# Altium PCB DB25-relay-HV-control.PcbDoc
Units mil, origin at the board's own origin, x right, y up, seen from the top; angles counter-clockwise.
Board outline 3100 x 2800 mil, 2 copper layers (Top Layer, Bottom Layer); 46 components, 42 nets, 170 pads, 0 vias.
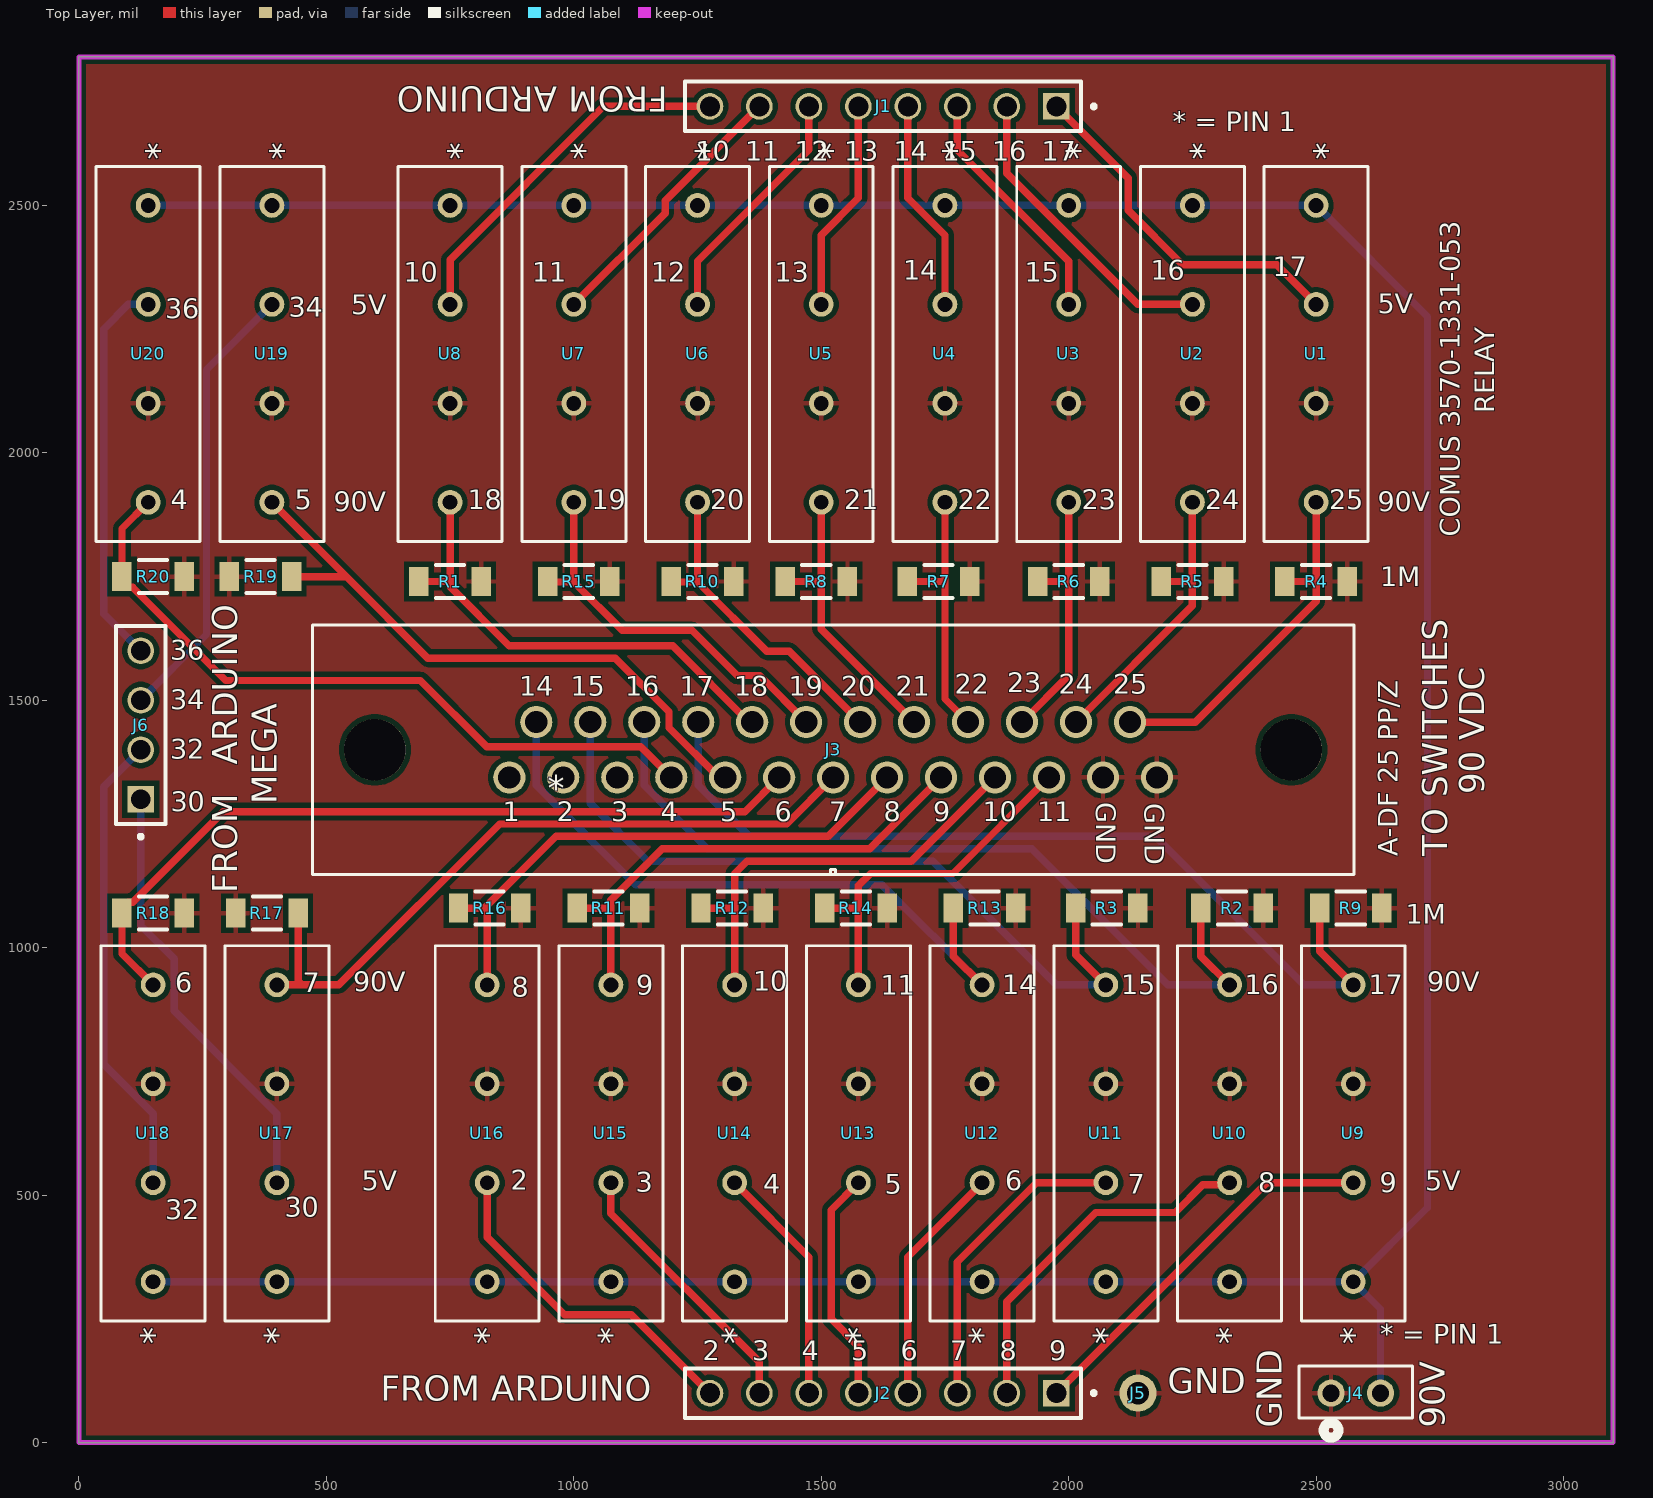
[diagram p0: Top Layer view]
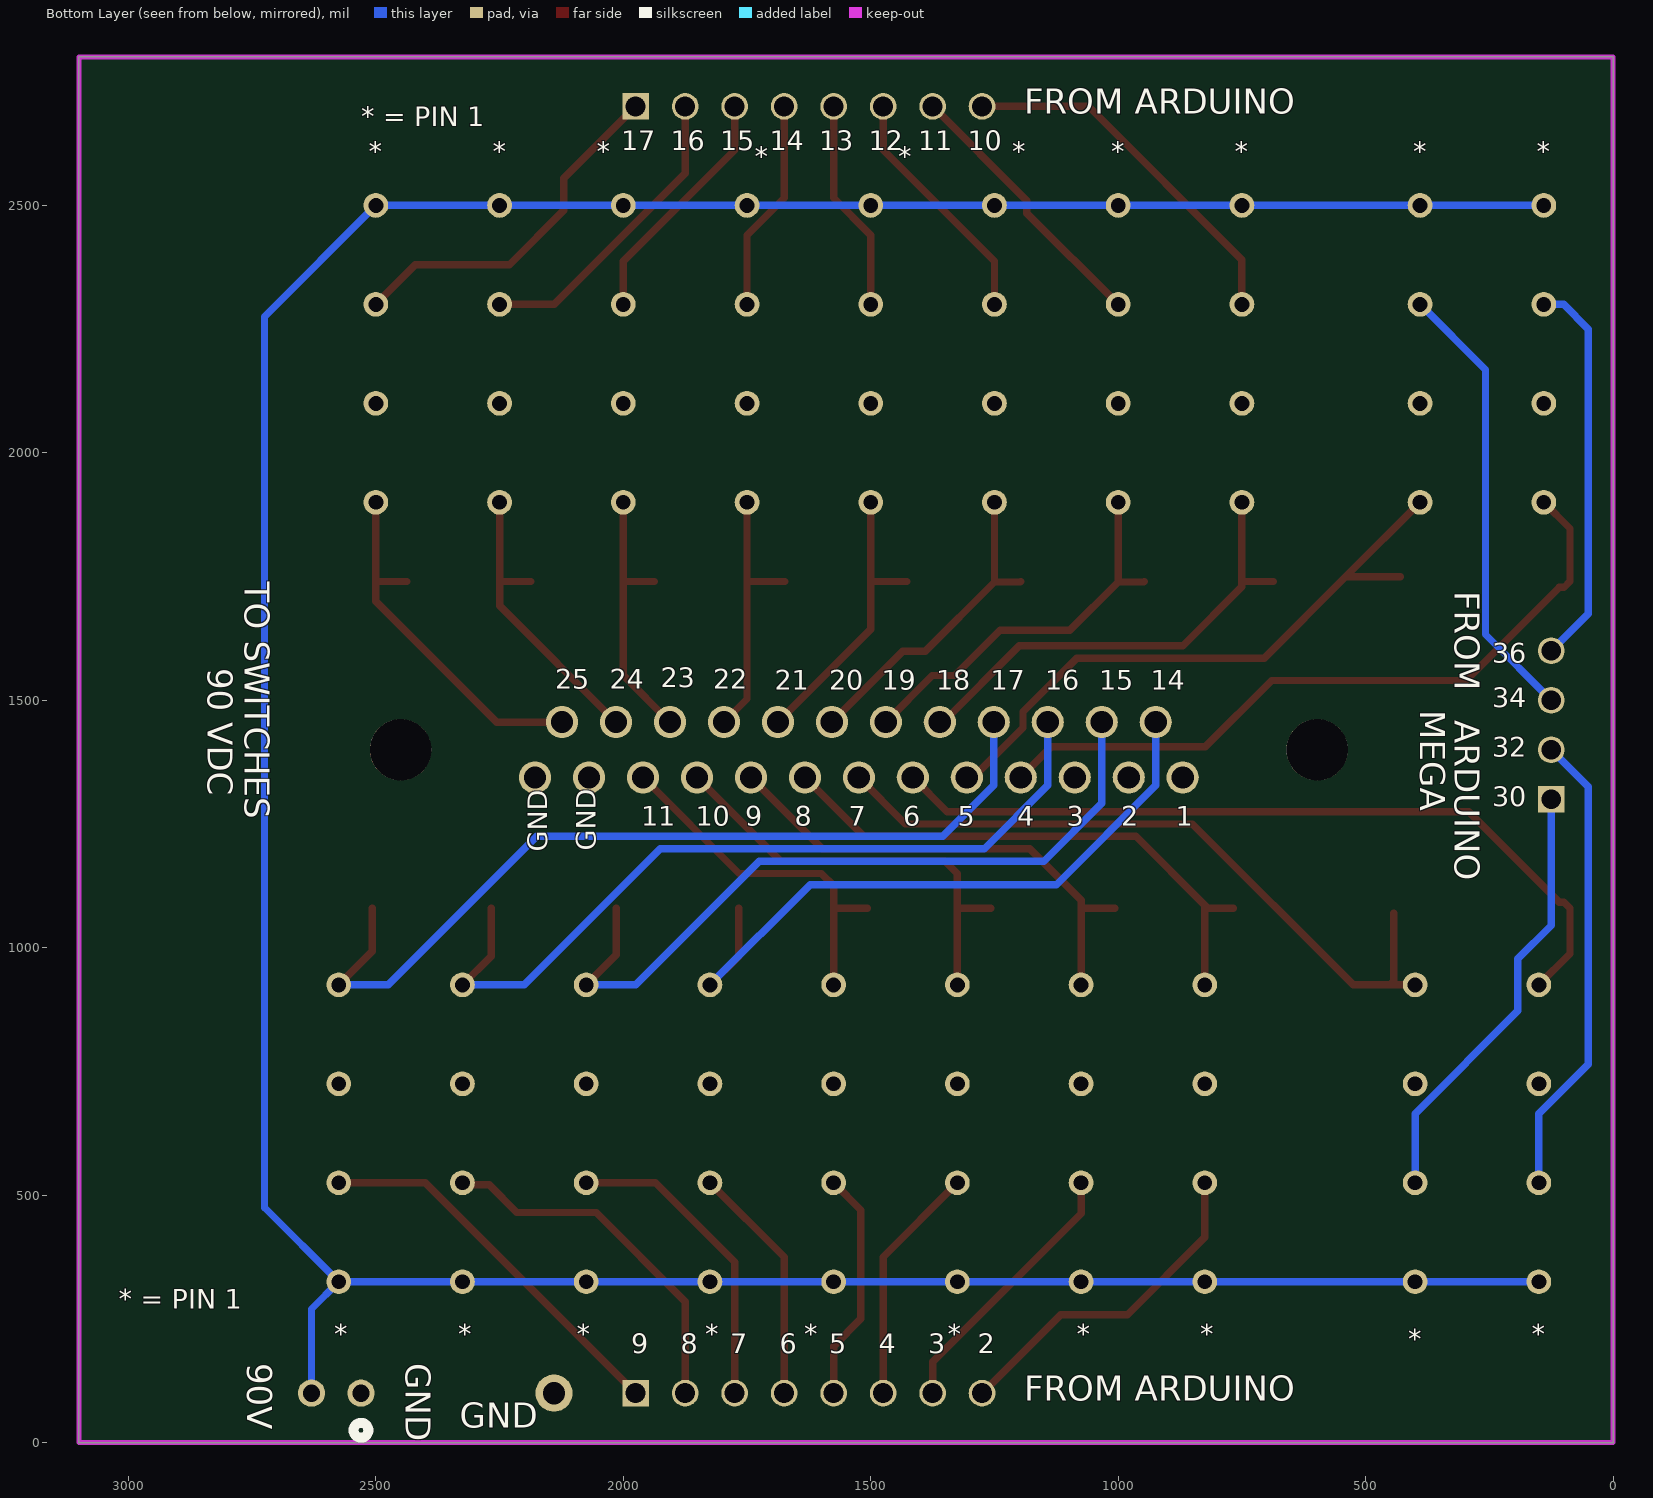
[diagram p1: Bottom Layer view, seen from below]
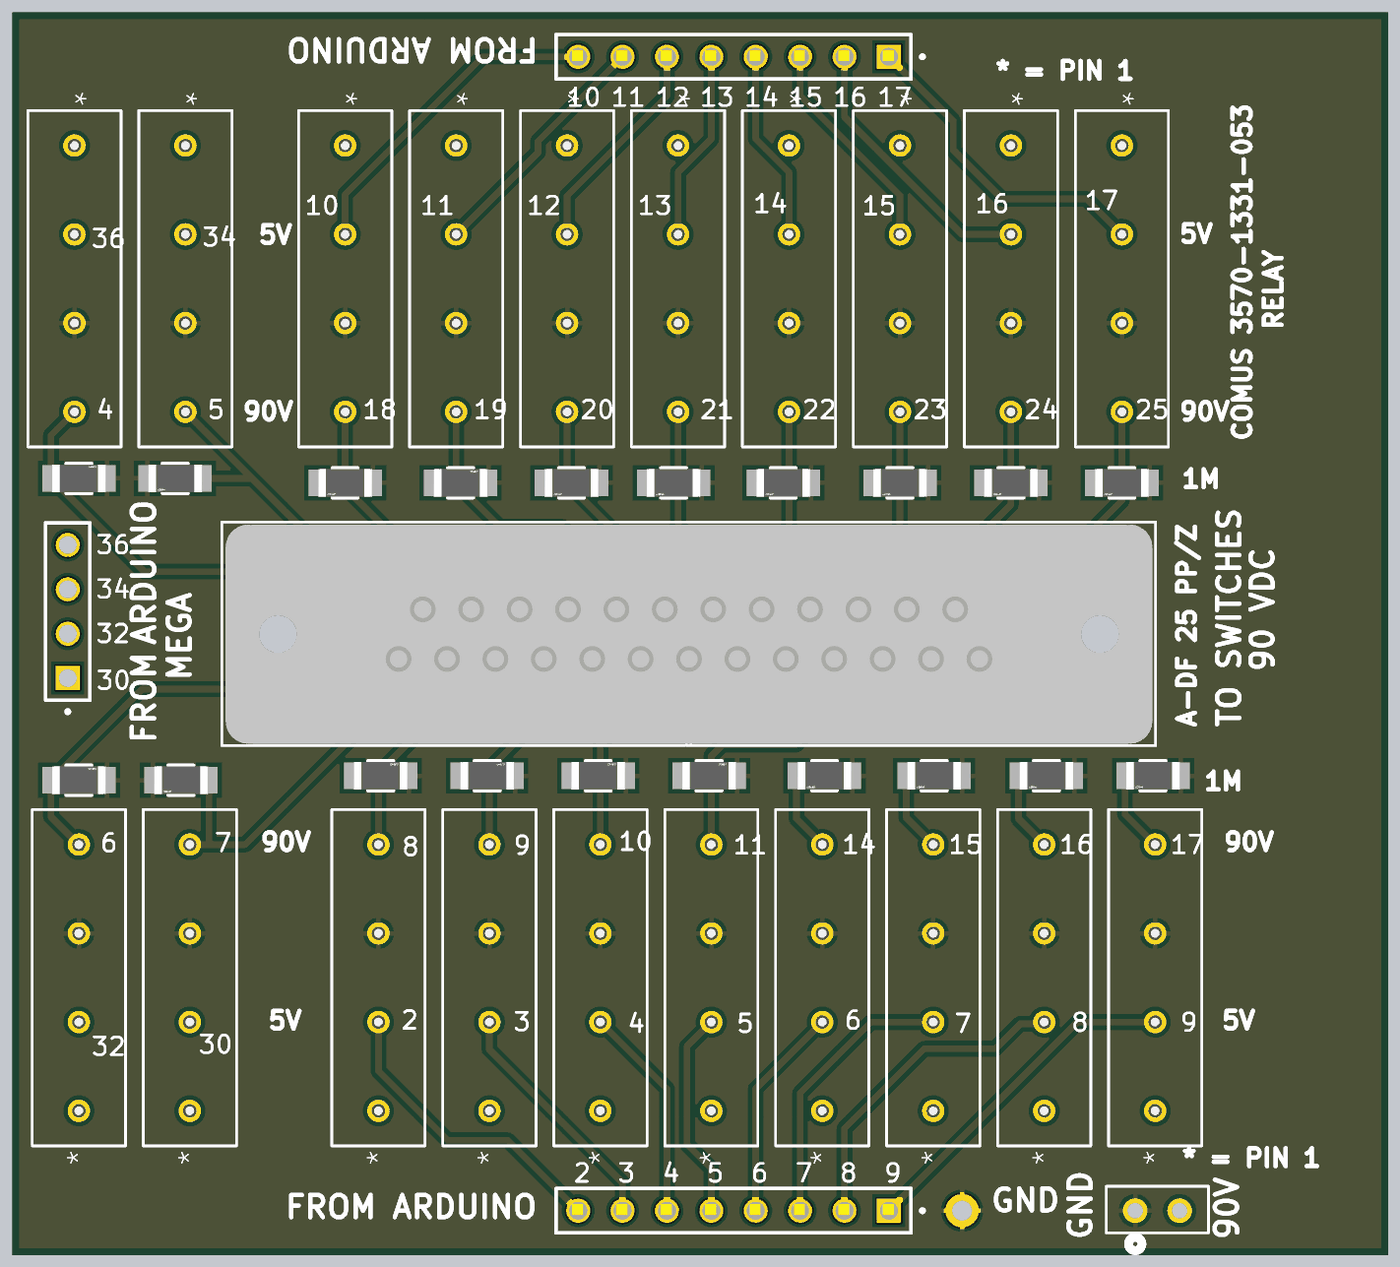
[diagram p2: 3D render of the assembled board from above, using the file's embedded part models]

## Layer stack, top to bottom
Top Solder: solder mask 0.4, Solder Resist, Dk 3.5
Top Layer: signal copper 1.4
Dielectric 1: dielectric 12.6, FR-4, Dk 4.8
Bottom Layer: signal copper 1.4
Bottom Solder: solder mask 0.4, Solder Resist, Dk 3.5

## Board outline
0,0 0,2800 3100,2800 3100,0

## Design rules (kind name [scope] priority, off if disabled: settings)
Clearance [All] p1: gap=10 ignorepadtopadclearanceinfootprint=FALSE
PolygonConnect [All] p1: connectstyle=Relief reliefconductorwidth=10 reliefentries=4 polygonreliefangle="90 Angle" airgapwidth=10
RoutingVias [All] p1: holewidth=28 width=50 viastyle="Through Hole" minholewidth=28 minwidth=50 maxholewidth=28 maxwidth=50
SolderMaskExpansion [All] p1: expansion=4 istentingtop=FALSE
Width [All] p1: maxlimit=30 minlimit=10 preferedwidth=15 minimp=50.000000 maximp=50.000000 favimp=50.000000
30 further rules are at their usual default settings.

## Components (designator, comment, footprint, x,y, rotation, side; value= is the part's Value field where it differs from the comment)
J1 "TSW-108-07-G-S" SAMTEC_TSW-108-07-G-S 1625,2700 r180 top
J2 "TSW-108-07-G-S" SAMTEC_TSW-108-07-G-S 1625,100 r180 top
J3 "A-DF 25 PP/Z" "CONN_A-DF 25 PPZ_ASM" 869.68,1344.09 r180 top
J4 "TSW-102-07-G-S" CON2_1X2_TU_TSW 2580,100 r0 top
J5 "Single Pin" "Single PC Pin" 2140,100 r0 top
J6 "TSW-104-07-G-S" SAMTEC_TSW-104-07-G-S 125,1450 r90 top
R1 "RC1206JR-070RL" FP-RC1206-MFG 750,1740 r180 top value=0Ω
R2 "RC1206JR-070RL" FP-RC1206-MFG 2330,1080 r180 top value=0Ω
R3 "RC1206JR-070RL" FP-RC1206-MFG 2077.01,1080 r180 top value=0Ω
R4 "RC1206JR-070RL" FP-RC1206-MFG 2500,1740 r180 top value=0Ω
R5 "RC1206JR-070RL" FP-RC1206-MFG 2250,1740 r180 top value=0Ω
R6 "RC1206JR-070RL" FP-RC1206-MFG 2000,1740 r180 top value=0Ω
R7 "RC1206JR-070RL" FP-RC1206-MFG 1737.01,1740 r180 top value=0Ω
R8 "RC1206JR-070RL" FP-RC1206-MFG 1490,1740 r180 top value=0Ω
R9 "RC1206JR-070RL" FP-RC1206-MFG 2570,1080 r180 top value=0Ω
R10 "RC1206JR-070RL" FP-RC1206-MFG 1260,1740 r180 top value=0Ω
R11 "RC1206JR-070RL" FP-RC1206-MFG 1070,1080 r0 top value=0Ω
R12 "RC1206JR-070RL" FP-RC1206-MFG 1320,1080 r0 top value=0Ω
R13 "RC1206JR-070RL" FP-RC1206-MFG 1830,1080 r180 top value=0Ω
R14 "RC1206JR-070RL" FP-RC1206-MFG 1570,1080 r0 top value=0Ω
R15 "RC1206JR-070RL" FP-RC1206-MFG 1010,1740 r0 top value=0Ω
R16 "RC1206JR-070RL" FP-RC1206-MFG 830,1080 r0 top value=0Ω
R17 "RC1206JR-070RL" FP-RC1206-MFG 380,1070 r180 top value=0Ω
R18 "RC1206JR-070RL" FP-RC1206-MFG 150,1070 r0 top value=0Ω
R19 "RC1206JR-070RL" FP-RC1206-MFG 367.01,1750 r180 top value=0Ω
R20 "RC1206JR-070RL" FP-RC1206-MFG 150,1750 r0 top value=0Ω
U1 "3570-1331-051" SIP_3570-1331_COM 2500,2500 r270 top
U2 "3570-1331-051" SIP_3570-1331_COM 2250,2500 r270 top
U3 "3570-1331-051" SIP_3570-1331_COM 2000,2500 r270 top
U4 "3570-1331-051" SIP_3570-1331_COM 1750,2500 r270 top
U5 "3570-1331-051" SIP_3570-1331_COM 1500,2500 r270 top
U6 "3570-1331-051" SIP_3570-1331_COM 1250,2500 r270 top
U7 "3570-1331-051" SIP_3570-1331_COM 1000,2500 r270 top
U8 "3570-1331-051" SIP_3570-1331_COM 750,2500 r270 top
U9 "3570-1331-051" SIP_3570-1331_COM 2575,325 r90 top
U10 "3570-1331-051" SIP_3570-1331_COM 2325,325 r90 top
U11 "3570-1331-051" SIP_3570-1331_COM 2075,325 r90 top
U12 "3570-1331-051" SIP_3570-1331_COM 1825,325 r90 top
U13 "3570-1331-051" SIP_3570-1331_COM 1575,325 r90 top
U14 "3570-1331-051" SIP_3570-1331_COM 1325,325 r90 top
U15 "3570-1331-051" SIP_3570-1331_COM 1075,325 r90 top
U16 "3570-1331-051" SIP_3570-1331_COM 825,325 r90 top
U17 "3570-1331-051" SIP_3570-1331_COM 400,325 r90 top
U18 "3570-1331-051" SIP_3570-1331_COM 150,325 r90 top
U19 "3570-1331-051" SIP_3570-1331_COM 390,2500 r270 top
U20 "3570-1331-051" SIP_3570-1331_COM 140,2500 r270 top

## Footprints (in the part's own frame and the unit in brackets; to place one, negate y for a bottom-side part, rotate by r counter-clockwise, add the part's x,y. Pads: shape width x height; smd on the part's side, far side on the other; paste and mask are expansions set on the pad)
CON2_1X2_TU_TSW [mil]
  round 55 / inner round 60 / far side round 55 hole 35 paste-99999 mask+0: 1(-50,0) 2(50,0)
  silkscreen extent -115,-90 115,55
"CONN_A-DF 25 PPZ_ASM" [mil]
  round 65 / inner round 60 / far side round 65 hole 45 paste-99999 mask+0: 1(0,0) 2(-109.06,0) 3(-218.11,0) 4(-327.17,0) 5(-436.22,0) 6(-545.28,0) 7(-654.33,0) 8(-763.39,0) 9(-872.44,0) 10(-981.5,0) 11(-1090.55,0) 12(-1199.61,0) 13(-1308.66,0) 14(-54.53,-111.81) 15(-163.58,-111.81) 16(-272.64,-111.81) 17(-381.69,-111.81) 18(-490.75,-111.81) 19(-599.8,-111.81) 20(-708.86,-111.81) 21(-817.91,-111.81) 22(-926.97,-111.81) 23(-1036.02,-111.81) 24(-1145.08,-111.81) 25(-1254.13,-111.81)
  round 124 / inner round 60 / far side round 124 hole 124 unplated paste-99999 mask-62: 26(-1580.32,-55.91) 27(271.65,-55.91)
  silkscreen extent -1706,-308 398,196, body extent -1699,-302 389,192, height 478
FP-RC1206-MFG [mm]
  rect 1x1.5 smd paste+0 mask+0: 1(-1.6,0) 2(1.6,0)
  silkscreen extent -0.72,-0.85 0.72,0.85, body extent -2.2,-0.95 2.2,0.95, height 0.25
SAMTEC_TSW-104-07-G-S [mm]
  rect 1.37x1.37 / inner round 1.37 / far side rect 1.37x1.37 hole 1.02: 01(-3.81,0)
  round 1.37 hole 1.02: 02(-1.27,0) 03(1.27,0) 04(3.81,0)
  silkscreen extent -5.83,-1.27 5.08,1.27
SAMTEC_TSW-108-07-G-S [mm]
  rect 1.37x1.37 / inner round 1.37 / far side rect 1.37x1.37 hole 1.02: 01(-8.89,0)
  round 1.37 hole 1.02: 02(-6.35,0) 03(-3.81,0) 04(-1.27,0) 05(1.27,0) 06(3.81,0) 07(6.35,0) 08(8.89,0)
  silkscreen extent -10.91,-1.27 10.16,1.27, body extent -10.25,-1.34 10.2,1.2, height 1.34
"Single PC Pin" [mil]
  round 75 hole 45: 1(0,0)
SIP_3570-1331_COM [mil]
  round 50 / inner round 60 / far side round 50 hole 30 paste-99999 mask+0: 1(0,0) 2(200,0) 3(400,0) 4(600,0)
  silkscreen extent -79,-105 679,105, body extent -74,-100 674,100, height 130

## Part data
J1 J2: "TSW - Samtec 2.54mm Pin Header 10.92mm Overall Pin Length (07) - Fast Stock", Package=None, Check_prices=https://www.snapeda.com/parts/TSW-108-07-G-S/Samtec+Inc./view-part/?ref=eda, MF="Samtec Inc.", MP=TSW-108-07-G-S, SnapEDA_Link=https://www.snapeda.com/parts/TSW-108-07-G-S/Samtec+Inc./view-part/?ref=snap
J3: library part "A-DF 25 PPZ", "No Description Available", Mfr_Name=Assmann, Copyright="Copyright (C) 2024 Ultra Librarian. All rights reserved.", Manufacturer_Part_Number="A-DF 25 PP/Z", RefDes=RefDes, Type=DEV
J4: "No Description Available", Mfr_Name="Samtec Inc", Copyright="Copyright (C) 2024 Ultra Librarian. All rights reserved.", Manufacturer_Part_Number=TSW-102-07-G-S, RefDes=RefDes, Type=DEV
J5: library part "Single PC Pin", Supplier Part Number 1=575-2617001340000, Supplier 1=Mouser
J6: "<a href=\"https://pricing.snapeda.com/parts/TSW-104-07-G-S/Samtec/view-part?ref=eda\">Check availability</a>", Package=None, Availability=Unavailable, MP=altium_native_batch, Price=None
R1 R2 R3 R4 R5 R6 R7 R8 R9 R10 R11 R12 R13 R14 R15 R16 R17 R18 R19 R20: library part CMP-2100-03681-2, "RES SMD 0 OHM JUMPER 1/4W 1206", Manufacturer=YAGEO, Package=RC1206, Power Rating=0.25W, Resistance=0Ω, Temperature="-55°C to +155°C", Temperature Coefficient=300ppm/°C, Temperature Range High=+155°C, Temperature Range Low=-55°C, Tolerance=5%, Voltage Rating=200V, Automotive=No, Category=Res, ComponentLink2Description=Datasheet, ComponentLink2URL=https://www.yageo.com/upload/media/product/productsearch/datasheet/rchip/PYu-RC_Group_51_RoHS_L_10.pdf, Composition="Thick Film", Device Class L1="Passive Components", Device Class L2=Resistors, Device Class L3="Chip SMD Resistors", Digikey Description="RES SMD 0 OHM JUMPER 1/4W 1206", Footprint Url=https://www.yageo.com/upload/website/yageo_PYu-R_Mount_10_19050818_343.pdf, Height=0.65mm, Ipc Land Pattern Name=RESC310160X55, Lead Free=Yes, Manufacturer Part Number=RC1206JR-070RL, Mouser Description="Resistor: thick film; SMD; 1206; 0O; 0.25W; ±5%; -55÷155°C", Octopart=https://octopart.com/rc1206jr-070rl-yageo-40025601, RoHS=TRUE, Series=RC
U1 U2 U3 U4 U5 U6 U7 U8 U9 U10 U11 U12 U13 U14 U15 U16 U17 U18 U19 U20: "No Description Available", Mfr_Name=Comus, Copyright="Copyright (C) 2024 Ultra Librarian. All rights reserved.", Manufacturer_Part_Number=3570-1331-051, RefDes=RefDes, Type=DEV

## Nets (pads, with @x,y where several pads share a name; then routed paths per layer and width w, separated by ;. In a path a pad name is that pad's centre, name@x,y a point inside that pad or via, vN(x,y) a via of type N, cw(c..) or ccw(c..) an arc to the next point about the centre after c; other vN are vias at no path point)
GND: J3.12 J3.13 J4.1 J5.1 R1.1 R2.1 R3.1 R4.1 R5.1 R6.1 R7.1 R8.1 R9.1 R10.1 R11.2 R12.2 R13.1 R14.2 R15.2 R16.2 R17.2 R18.2 R19.2 R20.2 U1.3 U2.3 U3.3 U4.3 U5.3 U6.3 U7.3 U8.3 U9.3 U10.3 U11.3 U12.3 U13.3 U14.3 U15.3 U16.3 U17.3 U18.3 U19.3 U20.3
NetJ1_01: J1.01 U1.2 | length 728.8
  Top Layer w15: J1.01 2120,2555 2120,2490 2230,2380 2420,2380 U1.2
NetJ1_02: J1.02 U2.2 | length 619.8
  Top Layer w15: J1.02 1875,2564.9 2139.9,2300 U2.2
NetJ1_03: J1.03 U3.2 | length 493.2
  Top Layer w15: J1.03 1775,2611.97 2000,2386.97 U3.2
NetJ1_04: J1.04 U4.2 | length 431.1
  Top Layer w15: J1.04 1675,2514.9 1750,2439.9 U4.2
NetJ1_05: J1.05 U5.2 | length 431.1
  Top Layer w15: U5.2 1500,2439.9 1575,2514.9 J1.05
NetJ1_06: J1.06 U6.2 | length 493.2
  Top Layer w15: U6.2 1250,2386.97 1475,2611.97 J1.06
NetJ1_07: J1.07 U7.2 | length 555.3
  Top Layer w15: U7.2 1184.49,2484.49 1184.49,2509.49 J1.07
NetJ1_08: J1.08 U8.2 | length 743.4
  Top Layer w15: U8.2 750,2390 1060,2700 J1.08
NetJ2_01: J2.01 U9.2 | length 776
  Top Layer w15: J2.01 2400,525 U9.2
NetJ2_02: J2.02 U10.2 | length 739.8
  Top Layer w15: J2.02 1875,285 2055,465 2215,465 2271.17,521.17 2321.17,521.17 U10.2 U10.2@2321.17,528.83
NetJ2_03: J2.03 U11.2 | length 631.3
  Top Layer w15: J2.03 1775,365 1935,525 U11.2
NetJ2_04: J2.04 U12.2 | length 487.1
  Top Layer w15: J2.04 1675,375 U12.2
NetJ2_05: J2.05 U13.2 | length 470.6
  Top Layer w15: J2.05 1575,195 1520,250 1520,470 U13.2
NetJ2_06: J2.06 U14.2 | length 487.1
  Top Layer w15: U14.2 1475,375 J2.06
NetJ2_07: J2.07 U15.2 | length 549.3
  Top Layer w15: U15.2 1075,463.03 1375,163.03 J2.07
NetJ2_08: J2.08 U16.2 | length 690.5
  Top Layer w15: U16.2 825,415 981.27,258.73 1116.27,258.73 J2.08
NetJ3_4: J3.4 R20.1 U20.4 | length 1455.7
  Top Layer w15: U20.4 87.01,1847.01 R20.1 87.01,1740.16 99.19,1727.97 109.04,1727.97 297.01,1540 689.9,1540 823.99,1405.91 1135.04,1405.91 J3.4
NetJ3_5: J3.5 R19.1 U19.4 | length 1275.1
  Top Layer w15: U19.4 540,1750 ; R19.1 540,1750 ; J3.5 1292.48,1344.09 1192.32,1444.25 1192.32,1476.62 1083.94,1585 705,1585 540,1750
NetJ3_6: J3.6 R18.1 U18.4 | length 1618.3
  Top Layer w15: U18.4 87.01,987.99 R18.1 87.01,1079.84 99.19,1092.03 109.04,1092.03 292.01,1275 1345.87,1275 J3.6
NetJ3_7: J3.7 R17.1 U17.4 | length 1445.5
  Top Layer w15: U17.4 450,925 ; R17.1 442.99,932.01 450,925 ; J3.7 1429.92,1250 850,1250 525,925 450,925
NetJ3_8: J3.8 R16.1 U16.4 | length 1136.4
  Top Layer w15: R16.1 819.03,1080 825,1085.97 ; U16.4 825,1085.97 ; J3.8 1513.98,1225 964.03,1225 825,1085.97
NetJ3_9: J3.9 R11.1 U15.4 | length 1010.9
  Top Layer w15: R11.1 1070,1080 1075,1075 ; U15.4 1075,1075 ; J3.9 1598.03,1200 1179.03,1200 1075,1095.97 1075,1075
NetJ3_10: J3.10 R12.1 U14.4 | length 901.6
  Top Layer w15: R12.1 1320,1080 1325,1075 ; U14.4 1325,1075 ; J3.10 1682.09,1175 1350,1175 1325,1150 1325,1075
NetJ3_11: J3.11 R14.1 U13.4 | length 744
  Top Layer w15: R14.1 1575,1080 ; U13.4 1575,1080 ; J3.11 1766.14,1150 1600,1150 1575,1125 1575,1080
NetJ3_14: J3.14 R13.2 U12.4 | length 1375.8
  Top Layer w15: R13.2 1767.01,982.99 U12.4
  Top Layer w30: J3.14 J3.14@925,1455.12
  Bottom Layer w15: J3.14 924.21,1327.91 1124.58,1127.54 1622.46,1127.54 U12.4
NetJ3_15: J3.15 R3.2 U11.4 | length 1538.1
  Top Layer w15: R3.2 2014.02,985.98 U11.4
  Bottom Layer w15: J3.15 1033.27,1291.73 1150,1175 1725,1175 1975,925 U11.4
NetJ3_16: J3.16 R2.2 U10.4 | length 1656.6
  Top Layer w15: R2.2 2267.01,982.99 U10.4
  Bottom Layer w15: J3.16 1142.32,1327.91 1270.23,1200 1925,1200 2200,925 U10.4
NetJ3_17: J3.17 R9.2 U9.4 | length 1801.7
  Top Layer w15: R9.2 2507.01,992.99 U9.4
  Bottom Layer w15: J3.17 1251.38,1327.91 1354.29,1225 2175,1225 2475,925 U9.4
NetJ3_18: J3.18 R1.2 U8.4 | length 957.5
  Top Layer w15: R1.2 750,1740 ; U8.4 750,1740 ; J3.18 1354.09,1455.91 1200,1610 869.03,1610 750,1729.03 750,1740
NetJ3_19: J3.19 R15.1 U7.4 | length 801.1
  Top Layer w15: R15.1 947.98,1739.03 1000,1739.03 ; U7.4 1000,1739.03 ; J3.19 1375.39,1550 1330,1550 1238.83,1641.17 1097.86,1641.17 1000,1739.03
NetJ3_20: J3.20 R10.2 U6.4 | length 660.2
  Top Layer w15: R10.2 1197.98,1739.03 1250,1739.03 ; U6.4 1250,1739.03 ; J3.20 1435.55,1598.9 1390.13,1598.9 1250,1739.03
NetJ3_21: J3.21 R8.2 U5.4 | length 594.8
  Top Layer w15: R8.2 1500,1740 ; U5.4 1500,1740 ; J3.21 1500,1643.5 1500,1740
NetJ3_22: J3.22 R7.2 U4.4 | length 539.4
  Top Layer w15: R7.2 1750,1740 ; U4.4 1750,1740 ; J3.22 1750,1502.56 1750,1740
NetJ3_23: J3.23 R6.2 U3.4 | length 546.1
  Top Layer w15: J3.23 2000,1550.2 2000,1740 ; R6.2 2000,1740 ; U3.4 2000,1740
NetJ3_24: J3.24 R5.2 U2.4 | length 604.5
  Top Layer w15: J3.24 2250,1691.14 2250,1740 ; R5.2 2250,1740 ; U2.4 2250,1740
NetJ3_25: J3.25 R4.2 U1.4 | length 740.3
  Top Layer w15: J3.25 2255.91,1455.91 2500,1700 2500,1740 ; R4.2 2500,1740 ; U1.4 2500,1740
NetJ4_2: J4.2 U1.1 U2.1 U3.1 U4.1 U5.1 U6.1 U7.1 U8.1 U9.1 U10.1 U11.1 U12.1 U13.1 U14.1 U15.1 U16.1 U17.1 U18.1 U19.1 U20.1 | length 7363.1
  Bottom Layer w15: U20.1 U19.1 U8.1 U7.1 U6.1 U5.1 U4.1 U3.1 U2.1 U1.1 2725,2275 2725,475 U9.1 ; U18.1 U17.1 U16.1 U15.1 U14.1 U13.1 U12.1 U11.1 U10.1 U9.1 ; J4.2 2630,270 U9.1
NetJ6_01: J6.01 U17.2 | length 888.9
  Bottom Layer w15: J6.01 125,1045 192.5,977.5 192.5,872.4 400,664.9 U17.2
NetJ6_02: J6.02 U18.2 | length 947.5
  Bottom Layer w15: J6.02 50,1325 50,764.9 150,664.9 U18.2
NetJ6_03: J6.03 U19.2 | length 909.8
  Bottom Layer w15: J6.03 257.88,1632.88 257.88,2167.88 U19.2
NetJ6_04: J6.04 U20.2 | length 791.8
  Bottom Layer w15: J6.04 50,1675 50,2250 100,2300 U20.2
pads on no net: J3.1 J3.2 J3.3 J3.26 J3.27

## Polygon pours and split planes (outlines as drawn)
GND on Top Layer "GND_L01_P000" (solid, pour order 0): 0,0 0,2800 3100,2800 3100,0

## Keep-outs
Keep-Out Layer:
  the board outline again, w10

## Silkscreen, mask and mechanical layers (free items; w line width, h text height)
Top Overlay:
  text "FROM ARDUINO" at 1190,2740 h50 r180
  text "* = PIN 1" at 2210,2650 h40
  text "10" at 1246,2590 h40
  text "11" at 1346,2590 h40
  text "12" at 1446,2590 h40
  text "13" at 1546,2590 h40
  text "14" at 1646,2590 h40
  text "15" at 1746,2590 h40
  text "16" at 1846,2590 h40
  text "17" at 1946,2590 h40
  text "17" at 2412.2,2357.15 h40
  text "14" at 1666,2350 h40
  text "16" at 2166,2350 h40
  text "10" at 656,2346 h40
  text "11" at 916,2346 h40
  text "12" at 1156,2346 h40
  text "13" at 1406,2346 h40
  text "15" at 1911.23,2345.26 h40
  text "5V" at 2624.51,2282 h40
  text "5V" at 550,2280 h40
  text "34" at 424.26,2274.93 h40
  text "36" at 174.91,2271.47 h40
  text "RELAY" at 2860,2080 h40 r90
  text "4" at 186,1886 h40
  text "5" at 436,1886 h40
  text "18" at 786,1886 h40
  text "19" at 1036,1886 h40
  text "20" at 1276,1886 h40
  text "21" at 1546,1886 h40
  text "22" at 1776,1886 h40
  text "23" at 2026,1886 h40
  text "24" at 2276,1886 h40
  text "25" at 2526,1886 h40
  text "90V" at 514.51,1882 h40
  text "90V" at 2624.51,1882 h40
  text "COMUS 3570-1331-053" at 2790,1830 h40 r90
  text "1M" at 2630,1730 h40
  text "36" at 184.91,1581.47 h40
  text "23" at 1876,1516 h40
  text "22" at 1769.8,1512.97 h40
  text "24" at 1979.8,1512.97 h40
  text "25" at 2089.8,1512.97 h40
  text "14" at 890.12,1508.88 h40
  text "15" at 993.9,1509.3 h40
  text "16" at 1103.9,1509.3 h40
  text "17" at 1213.9,1509.3 h40
  text "18" at 1323.9,1509.3 h40
  text "19" at 1433.9,1509.3 h40
  text "20" at 1540.12,1508.88 h40
  text "21" at 1650.12,1508.88 h40
  text "34" at 184.91,1481.47 h40
  text "32" at 184.91,1381.47 h40
  text "ARDUINO" at 320,1370 h50 r90
  text "90 VDC" at 2840,1310 h50 r90
  text "GND" at 2056,1294 h40 r270
  text "GND" at 2153.49,1292.08 h40 r270
  text "MEGA" at 400,1290 h50 r90
  text "30" at 186,1276 h40
  text "1" at 856,1256 h40
  text "2" at 966,1256 h40
  text "3" at 1076,1256 h40
  text "4" at 1176,1256 h40
  text "5" at 1296,1256 h40
  text "6" at 1406,1256 h40
  text "7" at 1516,1256 h40
  text "8" at 1626,1256 h40
  text "9" at 1726,1256 h40
  text "10" at 1826,1256 h40
  text "11" at 1936,1256 h40
  text "A-DF 25 PP/Z" at 2665,1185 h40 r90
  text "TO SWITCHES" at 2765,1185 h50 r90
  text "FROM" at 320,1110 h50 r90
  text "1M" at 2680.55,1048.92 h40
  text "10" at 1362.46,913.27 h40
  text "90V" at 554.51,912 h40
  text "90V" at 2724.51,912 h40
  text "6" at 194.87,909.6 h40
  text "7" at 452.37,910.31 h40
  text "14" at 1866,906 h40
  text "15" at 2106,906 h40
  text "16" at 2356,906 h40
  text "17" at 2606,906 h40
  text "9" at 1125.69,904.51 h40
  text "11" at 1620.61,904.97 h40
  text "8" at 874.35,901.1 h40
  text "2" at 872.4,510.81 h40
  text "5V" at 571.77,509.56 h40
  text "6" at 1871.44,510.06 h40
  text "5V" at 2720,510 h40
  text "3" at 1125.61,506.99 h40
  text "8" at 2382.51,505.42 h40
  text "9" at 2628.02,505.45 h40
  text "4" at 1382.69,503.13 h40
  text "5" at 1628.22,503.13 h40
  text "7" at 2119.27,503.13 h40
  text "30" at 416,456 h40
  text "32" at 174.91,451.47 h40
  text "* = PIN 1" at 2630,200 h40
  text "2" at 1261,166 h40
  text "3" at 1361,166 h40
  text "4" at 1461,166 h40
  text "5" at 1561,166 h40
  text "6" at 1661,166 h40
  text "7" at 1761,166 h40
  text "8" at 1861,166 h40
  text "9" at 1961,166 h40
  text "GND" at 2200,100 h50
  text "FROM ARDUINO" at 610,85 h50
  text "GND" at 2430,30 h50 r90
  text "90V" at 2760,30 h50 r90
Bottom Overlay:
  text "FROM ARDUINO" at 1190,2685 h50
  text "* = PIN 1" at 2530,2660 h40
  text "10" at 1304,2611 h40
  text "11" at 1404,2611 h40
  text "12" at 1504,2611 h40
  text "13" at 1604,2611 h40
  text "14" at 1704,2611 h40
  text "15" at 1804,2611 h40
  text "16" at 1904,2611 h40
  text "17" at 2004,2611 h40
  text "*" at 154,2589.34 h40
  text "*" at 404,2589.34 h40
  text "*" at 764,2589.34 h40
  text "*" at 1014,2589.34 h40
  text "*" at 1214,2589.34 h40
  text "*" at 2054,2589.34 h40
  text "*" at 2264,2589.34 h40
  text "*" at 2514,2589.34 h40
  text "*" at 1444,2579.34 h40
  text "*" at 1734,2579.34 h40
  text "TO SWITCHES" at 2765,1740 h50 r90
  text "FROM" at 320,1720 h50 r90
  text "36" at 244,1576 h40
  text "90 VDC" at 2840,1565 h50 r90
  text "23" at 1924,1526 h40
  text "22" at 1817.8,1522.97 h40
  text "24" at 2027.8,1522.97 h40
  text "25" at 2137.8,1522.97 h40
  text "14" at 934,1521 h40
  text "15" at 1037.78,1521.42 h40
  text "16" at 1147.78,1521.42 h40
  text "17" at 1257.78,1521.42 h40
  text "18" at 1367.78,1521.42 h40
  text "19" at 1477.78,1521.42 h40
  text "20" at 1584,1521 h40
  text "21" at 1694,1521 h40
  text "34" at 244,1486 h40
  text "MEGA" at 390,1480 h50 r90
  text "ARDUINO" at 320,1460 h50 r90
  text "32" at 244,1386 h40
  text "30" at 244,1286 h40
  text "1" at 884,1246 h40
  text "2" at 994,1246 h40
  text "3" at 1104,1246 h40
  text "4" at 1204,1246 h40
  text "5" at 1324,1246 h40
  text "6" at 1434,1246 h40
  text "7" at 1544,1246 h40
  text "8" at 1654,1246 h40
  text "9" at 1754,1246 h40
  text "10" at 1854,1246 h40
  text "11" at 1964,1246 h40
  text "GND" at 2056,1196 h40 r270
  text "GND" at 2153.49,1194.08 h40 r270
  text "* = PIN 1" at 3020,270 h40
  text "*" at 164,199.34 h40
  text "*" at 834,199.34 h40
  text "*" at 1084,199.34 h40
  text "*" at 1344,199.34 h40
  text "*" at 1634,199.34 h40
  text "*" at 1834,199.34 h40
  text "*" at 2094,199.34 h40
  text "*" at 2334,199.34 h40
  text "*" at 2584,199.34 h40
  text "*" at 414,189.34 h40
  text "2" at 1284,181 h40
  text "3" at 1384,181 h40
  text "4" at 1484,181 h40
  text "5" at 1584,181 h40
  text "6" at 1684,181 h40
  text "7" at 1784,181 h40
  text "8" at 1884,181 h40
  text "9" at 1984,181 h40
  text "GND" at 2440,160 h50 r90
  text "90V" at 2760,160 h50 r90
  text "FROM ARDUINO" at 1190,85 h50
  text "GND" at 2330,30 h50

## Text inside footprints (layer, text, board x,y; h text height)
J3: Top Overlay "*" at 982.18,1369.09 h50 r180; Mechanical 13 "*" at 982.18,1369.09 h50 r180
U1: Top Overlay "*" at 2475,2626.5 h50 r270; Mechanical 13 "*" at 2475,2576.5 h50 r270
U2: Top Overlay "*" at 2225,2626.5 h50 r270; Mechanical 13 "*" at 2225,2576.5 h50 r270
U3: Top Overlay "*" at 1975,2626.5 h50 r270; Mechanical 13 "*" at 1975,2576.5 h50 r270
U4: Top Overlay "*" at 1725,2626.5 h50 r270; Mechanical 13 "*" at 1725,2576.5 h50 r270
U5: Top Overlay "*" at 1475,2626.5 h50 r270; Mechanical 13 "*" at 1475,2576.5 h50 r270
U6: Top Overlay "*" at 1225,2626.5 h50 r270; Mechanical 13 "*" at 1225,2576.5 h50 r270
U7: Top Overlay "*" at 975,2626.5 h50 r270; Mechanical 13 "*" at 975,2576.5 h50 r270
U8: Top Overlay "*" at 725,2626.5 h50 r270; Mechanical 13 "*" at 725,2576.5 h50 r270
U9: Top Overlay "*" at 2600,198.5 h50 r90; Mechanical 13 "*" at 2600,248.5 h50 r90
U10: Top Overlay "*" at 2350,198.5 h50 r90; Mechanical 13 "*" at 2350,248.5 h50 r90
U11: Top Overlay "*" at 2100,198.5 h50 r90; Mechanical 13 "*" at 2100,248.5 h50 r90
U12: Top Overlay "*" at 1850,198.5 h50 r90; Mechanical 13 "*" at 1850,248.5 h50 r90
U13: Top Overlay "*" at 1600,198.5 h50 r90; Mechanical 13 "*" at 1600,248.5 h50 r90
U14: Top Overlay "*" at 1350,198.5 h50 r90; Mechanical 13 "*" at 1350,248.5 h50 r90
U15: Top Overlay "*" at 1100,198.5 h50 r90; Mechanical 13 "*" at 1100,248.5 h50 r90
U16: Top Overlay "*" at 850,198.5 h50 r90; Mechanical 13 "*" at 850,248.5 h50 r90
U17: Top Overlay "*" at 425,198.5 h50 r90; Mechanical 13 "*" at 425,248.5 h50 r90
U18: Top Overlay "*" at 175,198.5 h50 r90; Mechanical 13 "*" at 175,248.5 h50 r90
U19: Top Overlay "*" at 365,2626.5 h50 r270; Mechanical 13 "*" at 365,2576.5 h50 r270
U20: Top Overlay "*" at 115,2626.5 h50 r270; Mechanical 13 "*" at 115,2576.5 h50 r270